# Altium PCB PCB1.PcbDoc
Units mil, origin at the board's own origin, x right, y up, seen from the top; angles counter-clockwise.
Board outline 6000 x 4000 mil, 2 copper layers (Top Layer, Bottom Layer); 58 components, 28 nets, 134 pads, 0 vias.
Unrouted connection lines stored in the file: 79.
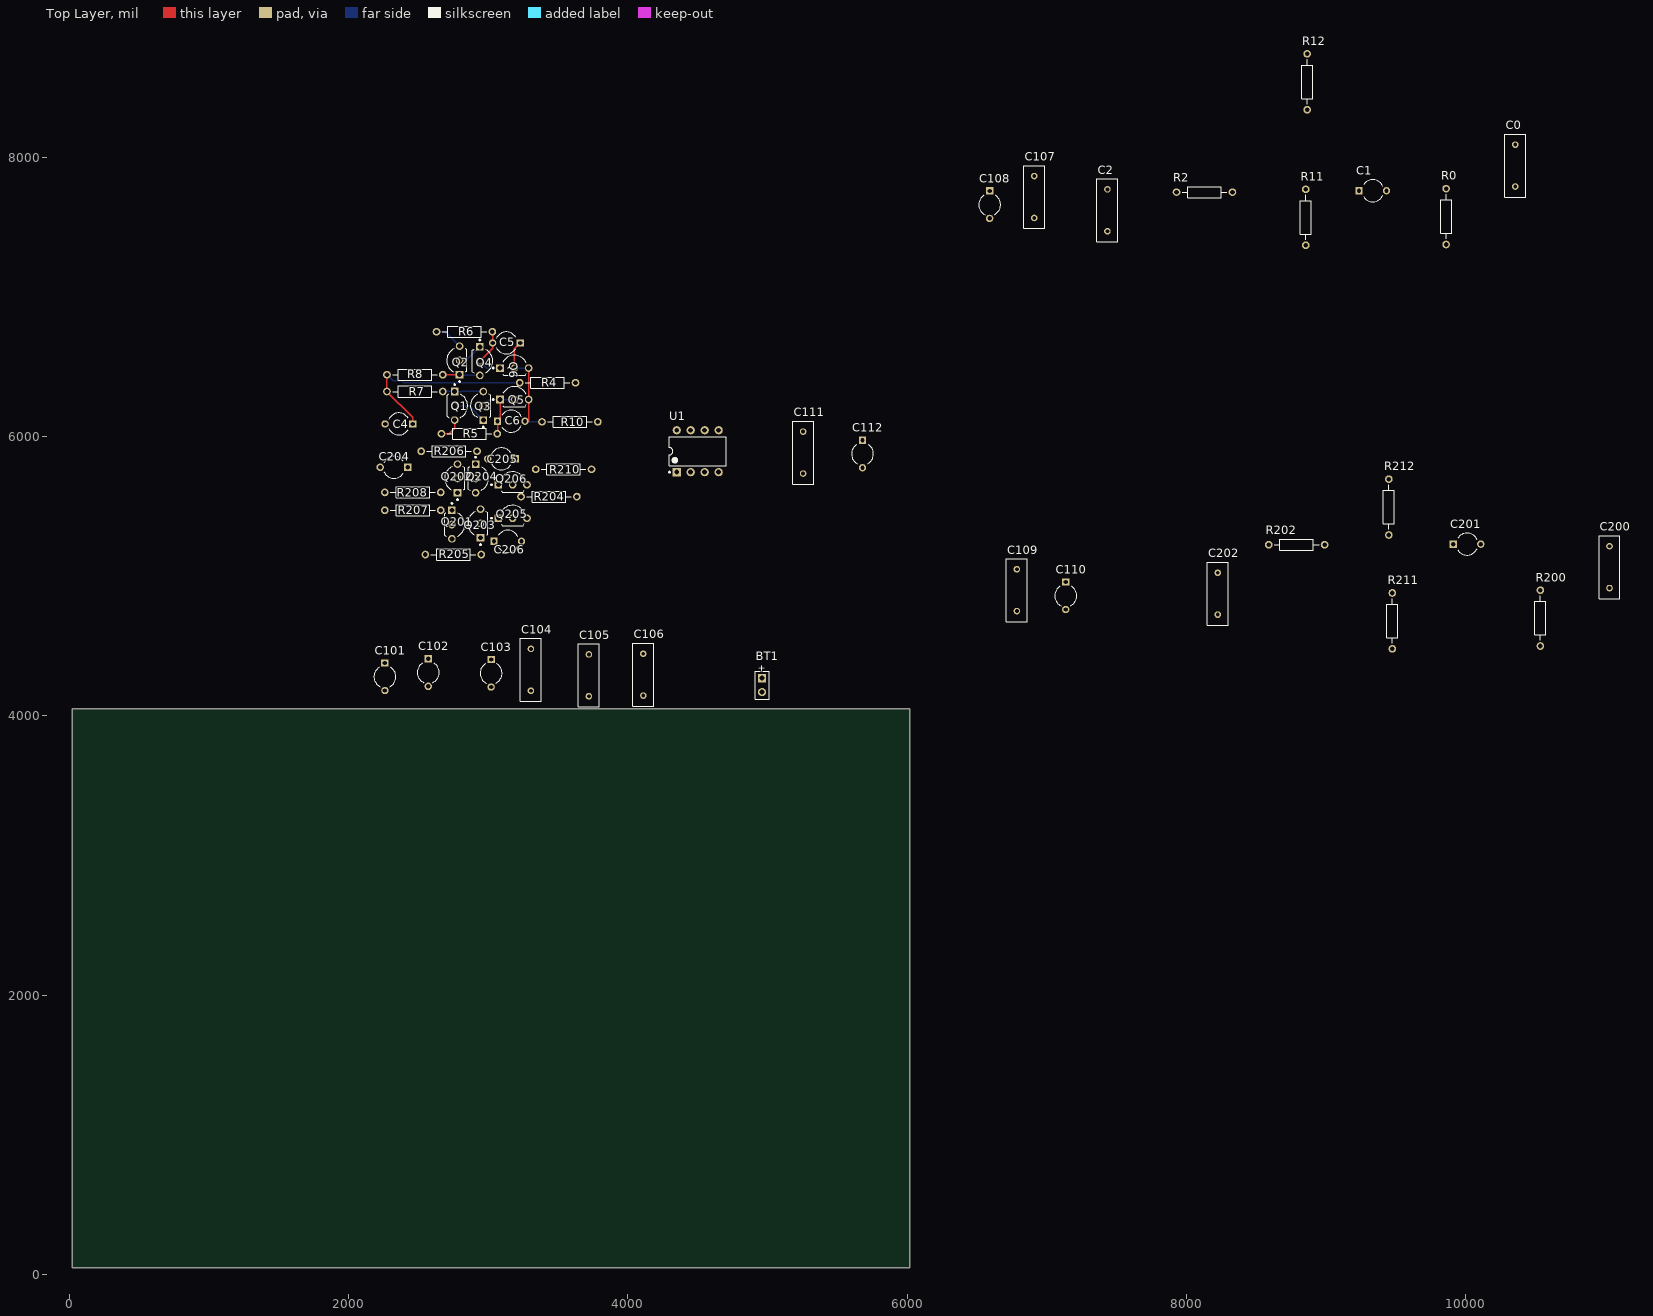
[diagram p0: Top Layer view]
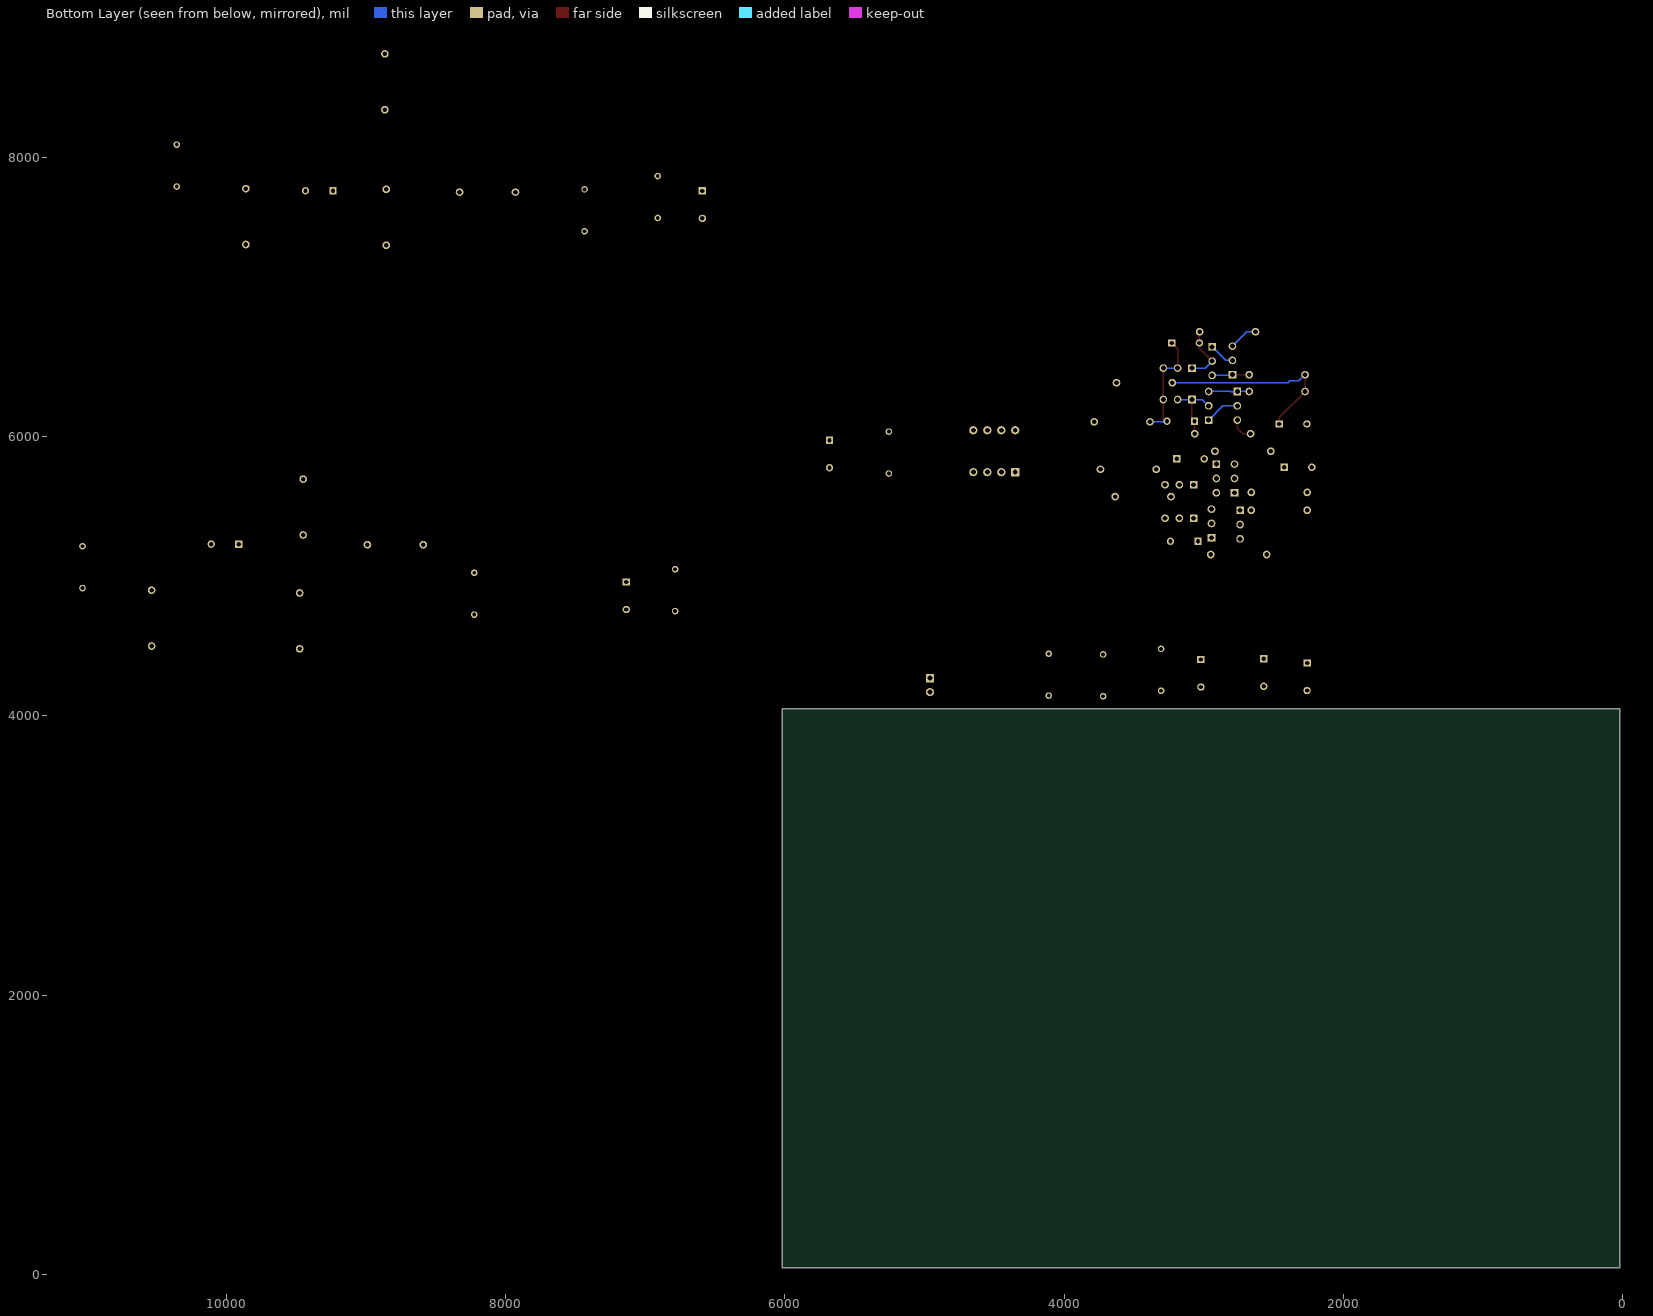
[diagram p1: Bottom Layer view, seen from below]

## Layer stack, top to bottom
Top Solder: solder mask 0.4, Solder Resist, Dk 3.5
Top Layer: signal copper 1.4
Dielectric 1: dielectric 12.6, FR-4, Dk 4.8
Bottom Layer: signal copper 3
Bottom Solder: solder mask 0.4, Solder Resist, Dk 3.5

## Board outline
20,50 6020,50 6020,4050 20,4050

## Design rules (kind name [scope] priority, off if disabled: settings)
Clearance [All] p1: gap=10 ignorepadtopadclearanceinfootprint=FALSE except(0: Arc-Hole Track-Hole SMDPad-Hole THPad-Hole Via-Hole Fill-Hole Poly-Hole Region-Hole Text-Hole)
DiffPairsRouting [All] p1: maxlimit=25 minlimit=10 mostfreqgap=20 toplayer_mingap=15 toplayer_minwidth=25 toplayer_maxwidth=35 toplayer_prefwidth=30 bottomlayer_maxgap=10 bottomlayer_prefgap=10 bottomlayer_minwidth=15 bottomlayer_maxwidth=15 bottomlayer_prefwidth=15 maxuncoupledlength=500
PolygonConnect [All] p1: connectstyle=Relief reliefconductorwidth=10 reliefentries=4 polygonreliefangle="90 Angle" airgapwidth=10
RoomDefinition mainBoard [InComponentClass('mainBoard')] p1: confinementstyle=ConfineIn formatcopy=TRUE lockcomponents=FALSE outline 9021.56,115 3011.56,115 3011.56,4130 9021.56,4130
RoutingVias [All] p1: holewidth=28 width=50 viastyle="Through Hole" minholewidth=28 minwidth=50 maxholewidth=28 maxwidth=50
SolderMaskExpansion [All] p1: expansion=4
Width [All] p1: maxlimit=10 minlimit=10 preferedwidth=10
29 further rules are at their usual default settings.

## Components (designator, comment, footprint, x,y, rotation, side; value= is the part's Value field where it differs from the comment)
BT1 "Battery" BAT-2 4960.61,4220 r270 top
C0 "Cap" RAD-0.3 10353.58,7940 r90 top value=100pF
C1 "Cap2" CAPR5-4X5 9333.58,7760 r0 top value=1,47u
C2 "Cap" RAD-0.3 7433.58,7620 r90 top value=780p
C4 "Cap2" CAPR5-4X5 2360,6090 r180 top value=470u
C5 "Cap2" CAPR5-4X5 3130,6670 r180 top value=100u
C6 "Cap2" CAPR5-4X5 3165,6110 r0 top value=100u
C101 "Cap2" CAPR5-4X5 2260.61,4280 r270 top value=470u
C102 "Cap2" CAPR5-4X5 2570.61,4310 r270 top value=470u
C103 "Cap2" CAPR5-4X5 3020.61,4305 r270 top value=470u
C104 "Cap" RAD-0.3 3305.61,4330 r90 top value=100n
C105 "Cap" RAD-0.3 3720.61,4290 r90 top value=100n
C106 "Cap" RAD-0.3 4110.61,4295 r90 top value=100n
C107 "Cap" RAD-0.3 6910,7715 r90 top value=100n
C108 "Cap2" CAPR5-4X5 6590,7660 r270 top value=440u
C109 "Cap" RAD-0.3 6785,4900 r90 top value=100n
C110 "Cap2" CAPR5-4X5 7135,4860 r270 top value=440u
C111 "Cap" RAD-0.3 5255,5885 r90 top value=100n
C112 "Cap2" CAPR5-4X5 5680,5875 r270 top value=440u
C200 "Cap" RAD-0.3 11028.58,5065 r90 top value=100pF
C201 "Cap2" CAPR5-4X5 10008.58,5230 r0 top value=1,47u
C202 "Cap" RAD-0.3 8223.58,4875 r90 top value=780p
C204 "Cap2" CAPR5-4X5 2325,5780 r180 top value=470u
C205 "Cap2" CAPR5-4X5 3095,5840 r180 top value=100u
C206 "Cap2" CAPR5-4X5 3140,5250 r0 top value=100u
Q1 "BC327-40ZL1G" ONSC-TO-92-3-29-11_AM_BL 2760,6220 r270 top
Q2 "BC337-25RL1" ONSC-TO-92-3-29-11_AM_BL 2795,6545 r90 top
Q3 "BC337-25RL1" ONSC-TO-92-3-29-11_AM_BL 2965,6220 r90 top
Q4 "BC327-40ZL1G" ONSC-TO-92-3-29-11_AM_BL 2940,6540 r270 top
Q5 "BC337-25RL1" ONSC-TO-92-3-29-11_AM_BL 3187.36,6265 r0 top
Q6 "BC327-40ZL1G" ONSC-TO-92-3-29-11_AM_BL 3187.36,6490 r0 top
Q201 "BC327-40ZL1G" ONSC-TO-92-3-29-11_AM_BL 2740,5370 r270 top
Q202 "BC337-25RL1" ONSC-TO-92-3-29-11_AM_BL 2780,5700 r90 top
Q203 "BC337-25RL1" ONSC-TO-92-3-29-11_AM_BL 2945,5377.64 r90 top
Q204 "BC327-40ZL1G" ONSC-TO-92-3-29-11_AM_BL 2910,5700 r270 top
Q205 "BC337-25RL1" ONSC-TO-92-3-29-11_AM_BL 3175,5415 r0 top
Q206 "BC327-40ZL1G" ONSC-TO-92-3-29-11_AM_BL 3175,5655 r0 top
R0 "Res2" AXIAL-0.4 9858.58,7575 r90 top value=20K
R2 "Res2" AXIAL-0.4 8128.58,7750 r0 top value=10K
R4 "Res2" AXIAL-0.4 3425,6385 r0 top value=22K
R5 "Res2" AXIAL-0.4 2865,6020 r180 top value=100K
R6 "Res2" AXIAL-0.4 2830,6750 r0 top value=100K
R7 "Res2" AXIAL-0.4 2475,6322.36 r0 top value=10
R8 "Res2" AXIAL-0.4 2475,6442.64 r180 top value=10
R10 "Res2" AXIAL-0.4 3585,6105 r0 top value=0
R11 "Res2" AXIAL-0.4 8853.58,7570 r90 top value=47K
R12 "Res2" AXIAL-0.4 8863.58,8540 r90 top value=47K
R200 "Res2" AXIAL-0.4 10533.58,4700 r90 top value=20K
R202 "Res2" AXIAL-0.4 8788.58,5225 r0 top value=10K
R204 "Res2" AXIAL-0.4 3435,5570 r0 top value=22K
R205 "Res2" AXIAL-0.4 2750,5155 r180 top value=100K
R206 "Res2" AXIAL-0.4 2720,5895 r0 top value=100K
R207 "Res2" AXIAL-0.4 2460,5472.36 r0 top value=10
R208 "Res2" AXIAL-0.4 2460,5600 r180 top value=10
R210 "Res2" AXIAL-0.4 3540,5765 r0 top value=0
R211 "Res2" AXIAL-0.4 9473.58,4680 r90 top value=47K
R212 "Res2" AXIAL-0.4 9448.58,5495 r90 top value=47K
U1 "OP200AZ" ADI-Q-8 4500,5895 r90 top

## Footprints (in the part's own frame and the unit in brackets; to place one, negate y for a bottom-side part, rotate by r counter-clockwise, add the part's x,y. Pads: shape width x height; smd on the part's side, far side on the other; paste and mask are expansions set on the pad)
ADI-Q-8 [mm] "DIP, 8-Leads, Body 10.29x6.73mm, Pitch 2.54mm"
  rect 1.5x1.5 hole 0.9: 1(-3.81,3.81)
  round 1.5 hole 0.9: 2(-3.81,1.27) 3(-3.81,-1.27) 4(-3.81,-3.81) 5(3.81,-3.81) 6(3.81,-1.27) 7(3.81,1.27) 8(3.81,3.81)
  silkscreen extent -3.93,-5.15 2.65,5.23, body extent -3.95,-5.15 3.95,5.15, height 5.08
AXIAL-0.4 [mm] "Axial Device, Thru-Hole; 2 Leads; 0.4 in Pin Spacing"
  round 1.4 hole 0.85: 1(-5.08,0) 2(5.08,0)
  silkscreen extent -4.06,-1.02 4.06,1.02
BAT-2 [mm] "Battery; 2 Leads"
  rect 1.5x1.5 hole 0.9: 1(-1.27,0)
  round 1.5 hole 0.9: 2(1.27,0)
  silkscreen extent -2.54,-1.27 2.54,1.27
CAPR5-4X5 [mm] "Capacitor; 2 Leads"
  rect 1.35x1.35 hole 0.8: 1(-2.5,0)
  round 1.35 hole 0.8: 2(2.5,0)
  silkscreen extent -1.69,-2 1.82,2
ONSC-TO-92-3-29-11_AM_BL [mm] "TO, 3-Leads, Body Dia 4.7mm, Pitch 2.6mm"
  rect 1.4x1.4 hole 0.9: 1(-2.6,0)
  round 1.4 hole 0.9: 2(0,0) 3(2.6,0)
  silkscreen extent -3.97,-1.34 2.13,2.35, body extent -2.84,-1.34 2.84,2.35, height 8.92
RAD-0.3 [mm] "Radial Cap, Thru-Hole; 2 Leads; 0.3 in Pin Spacing"
  round 1.2 hole 0.7: 1(-3.81,0) 2(3.81,0)
  silkscreen extent -5.71,-1.9 5.71,1.91

## Part data
BT1: "Multicell Battery", LatestRevisionDate=17-Jul-2002, LatestRevisionNote="Re-released for DXP Platform.", PackageDescription="Battery; 2 Leads", PackageReference=BAT-2, Published=24-Mar-1999, Publisher="Altium Limited"
C0 C1 C2 C4 C5 C6 C101 C102 C103 C104 C105 C106 C107 C108 C109 C110 C111 C112 C200 C201 C202 C204 C205 C206: "Capacitor", Publisher="Altium Limited"
  C0 C2 C104 C105 C106 C107 C109 C111 C200 C202: LatestRevisionDate=17-Jul-2002, LatestRevisionNote="Re-released for DXP Platform.", PackageDescription="Radial Cap, Thru-Hole; 2 Leads; 0.3 in Pin Spacing", PackageReference=RAD-0.3, Published=8-Jun-2000
  C1 C4 C5 C6 C101 C102 C103 C108 C110 C112 C201 C204 C205 C206: PackageDescription="Capacitor; 2 Leads", PackageReference=CAPR5-4X5, Published=23-Sep-2002
Q1 Q4 Q6 Q201 Q204 Q206: "Amplifier Transistor, PNP Silicon, 3-Pin TO-92, Pb-Free, Ammo Box", Manufacturer="On Semiconductor", Supplier Part Number 1=BC327-40ZL1GOSTB-ND, ComponentLink1Description="Manufacturer URL", ComponentLink1URL=http://www.onsemi.com/, ComponentLink2Description=Datasheet, ComponentLink2URL=http://www.onsemi.com/pub_link/Collateral/BC327-D.PDF, ComponentLink3Description="Package Specification", ComponentLink3URL=http://www.onsemi.com/pub_link/Collateral/MAC97-D.PDF, DatasheetVersion="Rev. 6", IC Continuous (A)=-0.8, Mounting Technology="Through Hole", PackageDescription="3-Pin Transistor Outline, Body 4.825 x 3.685 mm, Pitch 1.27 mm", PackageReference=TO-92-3-29-11_AM_BL, PackageVersion="Rev. AM", Packing="Ammo Box", PartNumber=BC327-40ZL1G, Polarity=PNP, RoHS=TRUE, Supplier 1=Digi-Key, Supplier 2=Digi-Key, Supplier 3=Farnell, Supplier 4=Farnell, Supplier 5=Newark, Supplier 6=Mouser, Supplier Part Number 2=BC327-40ZL1GOSCT-ND, Supplier Part Number 3=2317541, Supplier Part Number 4=2322378, Supplier Part Number 5=26K3394, Supplier Part Number 6=863-BC327-40ZL1G
Q2 Q3 Q5 Q202 Q203 Q205: "Amplifier Transistor, NPN Silicon, 3-Pin TO-92, Tape and Reel", Manufacturer="On Semiconductor", ComponentLink1Description="Manufacturer URL", ComponentLink1URL=http://www.onsemi.com/, ComponentLink2Description=Datasheet, ComponentLink2URL=http://www.onsemi.com/pub_link/Collateral/BC337-D.PDF, ComponentLink3Description="Package Specification", ComponentLink3URL=http://www.onsemi.com/pub_link/Collateral/MAC97-D.PDF, DatasheetVersion="Rev. 8", IC Continuous (A)=0.8, Mounting Technology="Through Hole", Note=0, PackageDescription="3-Pin Transistor Outline, Body 4.825 x 3.685 mm, Pitch 1.27 mm", PackageReference=TO-92-3-29-11_AM_BL, PackageVersion="Rev. AM", Packing="Tape and Reel", PartNumber=BC337-25RL1, Polarity=NPN, RoHS=FALSE
R0 R2 R4 R5 R6 R7 R8 R10 R11 R12 R200 R202 R204 R205 R206 R207 R208 R210 R211 R212: "Resistor", LatestRevisionDate=17-Jul-2002, LatestRevisionNote="Re-released for DXP Platform.", PackageDescription="Axial Device, Thru-Hole; 2 Leads; 0.4 in Pin Spacing", PackageReference=AXIAL-0.4, Published=8-Jun-2000, Publisher="Altium Limited"
U1: "Double Channel Low Supply Current Operational Amplifier, 500 KHz BW, 150 mV/us SR, Military, 8-pin DIP (Q-8), Tube", Amplifiers Per Package=2, Generic Part Number=OP200, Input Bias Current=100pA, Input Offset Voltage=80uV, Manufacturer="Analog Devices", Supplier Part Number 1=OP200AZ-ND, ComponentLink1Description="Manufacturer URL", ComponentLink1URL=http://www.analog.com/en/index.html, ComponentLink2Description=Datasheet, ComponentLink2URL=http://www.analog.com/static/imported-files/data_sheets/OP200.pdf, ComponentLink3Description="Package Specification", ComponentLink3URL=http://www.analog.com/static/imported-files/packages/3925655241313314758Q_8.pdf, DatasheetVersion="Rev. E", Iq/Amp=775uA, Mounting Technology="Through Hole", PackageDescription="8-Pin Ceramic Dual In-Line Package, Row spacing 7.62 mm, Pitch 2.54 mm", PackageReference=Q-8, Packing=Tube, PartNumber=OP200AZ, Slew Rate=150mV/us, Small Signal Bandwidth=500KHz, Supplier 1=Digi-Key, Supplier 2=Newark, Supplier Part Number 2=05F8550, V Span Max=40V, V Span Min=6V

## Nets (pads, with @x,y where several pads share a name; then routed paths per layer and width w, separated by ;. In a path a pad name is that pad's centre, name@x,y a point inside that pad or via, vN(x,y) a via of type N, cw(c..) or ccw(c..) an arc to the next point about the centre after c; other vN are vias at no path point)
GND: BT1.2 C2.1 C101.2 C102.2 C103.2 C104.1 C105.1 C106.1 C107.1 C108.2 C109.1 C110.2 C111.1 C112.2 C202.1 Q2.3 Q202.3 R0.1 R6.1 R11.1 R200.1 R206.1 R211.1 U1.4 | length 207.5
  Bottom Layer w10: R6.1 2692.36,6750 Q2.3
NetBT1_1: BT1.1 C101.1 C102.1 C103.1 C104.2 C105.2 C106.2 C107.2 C108.1 C109.2 C110.1 C111.2 C112.1 Q1.3 Q201.3 R5.2 R12.2 R205.2 R212.2 U1.8 | length 169.2
  Top Layer w10: R5.2 2720,6020 2760,6060 Q1.3
NetC0_1: C0.1 C1.2 R0.2
NetC1_1: C1.1 R2.2 R11.2 R12.1
NetC2_2: C2.2 R2.1 U1.3
NetC4_1: C4.1 R4.1 R7.1 R8.2 | length 1402.5
  Top Layer w10: R8.2 R7.1 2458.43,6138.94 C4.1
  Bottom Layer w10: R8.2 2318.64,6399 2383,6399 2397,6385 R4.1
NetC5_1: C5.1 C6.2 Q5.3 Q6.2 Q6.3 R10.1 | length 832.9
  Top Layer w10: Q6.2 3187.36,6628.94 C5.1 ; C6.2 3290,6110 3290,6264.72 Q5.3 3290,6265.28 3290,6489.72 Q6.3
  Bottom Layer w10: Q6.2 Q6.3 ; C6.2 3263.43,6105 R10.1
NetC5_2: C5.2 Q4.2 Q6.1 R6.2 | length 414.3
  Top Layer w10: Q4.2 3031.57,6631.57 C5.2 3031.57,6748.43 R6.2
  Bottom Layer w10: Q4.2 2990,6490 Q6.1
NetC6_1: C6.1 Q3.2 Q5.1 Q5.2 R5.1 | length 494.3
  Top Layer w10: R5.1 3066.57,6021.57 C6.1 3085,6128.43 Q5.1
  Bottom Layer w10: Q3.2 3010,6265 Q5.1 Q5.2
NetC200_1: C200.1 C201.2 R200.2
NetC201_1: C201.1 R202.2 R211.2 R212.1
NetC202_2: C202.2 R202.1 U1.5
NetC204_1: C204.1 R204.1 R207.1 R208.2
NetC205_1: C205.1 C206.2 Q205.3 Q206.2 Q206.3 R210.1
NetC205_2: C205.2 Q204.2 Q206.1 R206.2
NetC206_1: C206.1 Q203.2 Q205.1 Q205.2 R205.1
NetQ1_1: Q1.1 Q3.3 R7.2 | length 291.4
  Bottom Layer w10: R7.2 2675,6323 2759.36,6323 Q1.1 2808.36,6322.36 2809,6323 2964.36,6323 Q3.3
NetQ1_2: Q1.2 Q3.1 | length 247.4
  Bottom Layer w10: Q1.2 2862.64,6220 Q3.1
NetQ2_1: Q2.1 Q4.3 R8.1 | length 270
  Top Layer w10: R8.1 Q2.1
  Bottom Layer w10: Q2.1 2795,6437.64 Q4.3
NetQ2_2: Q2.2 Q4.1 | length 185.3
  Bottom Layer w10: Q2.2 2842.64,6545 Q4.1
NetQ201_1: Q201.1 Q203.3 R207.2
NetQ201_2: Q201.2 Q203.1
NetQ202_1: Q202.1 Q204.3 R208.1
NetQ202_2: Q202.2 Q204.1
NetR4_2: R4.2 U1.2
NetR10_2: R10.2 U1.1
NetR204_2: R204.2 U1.6
NetR210_2: R210.2 U1.7
pads on no net: C0.2 C4.2 C200.2 C204.2

## Text inside footprints (layer, text, board x,y; h text height)
BT1: Top Overlay "+" at 4937.89,4364.49 h45.28 r270